# Allegro board remotepanasonicDB9-rout-V2-1.brd
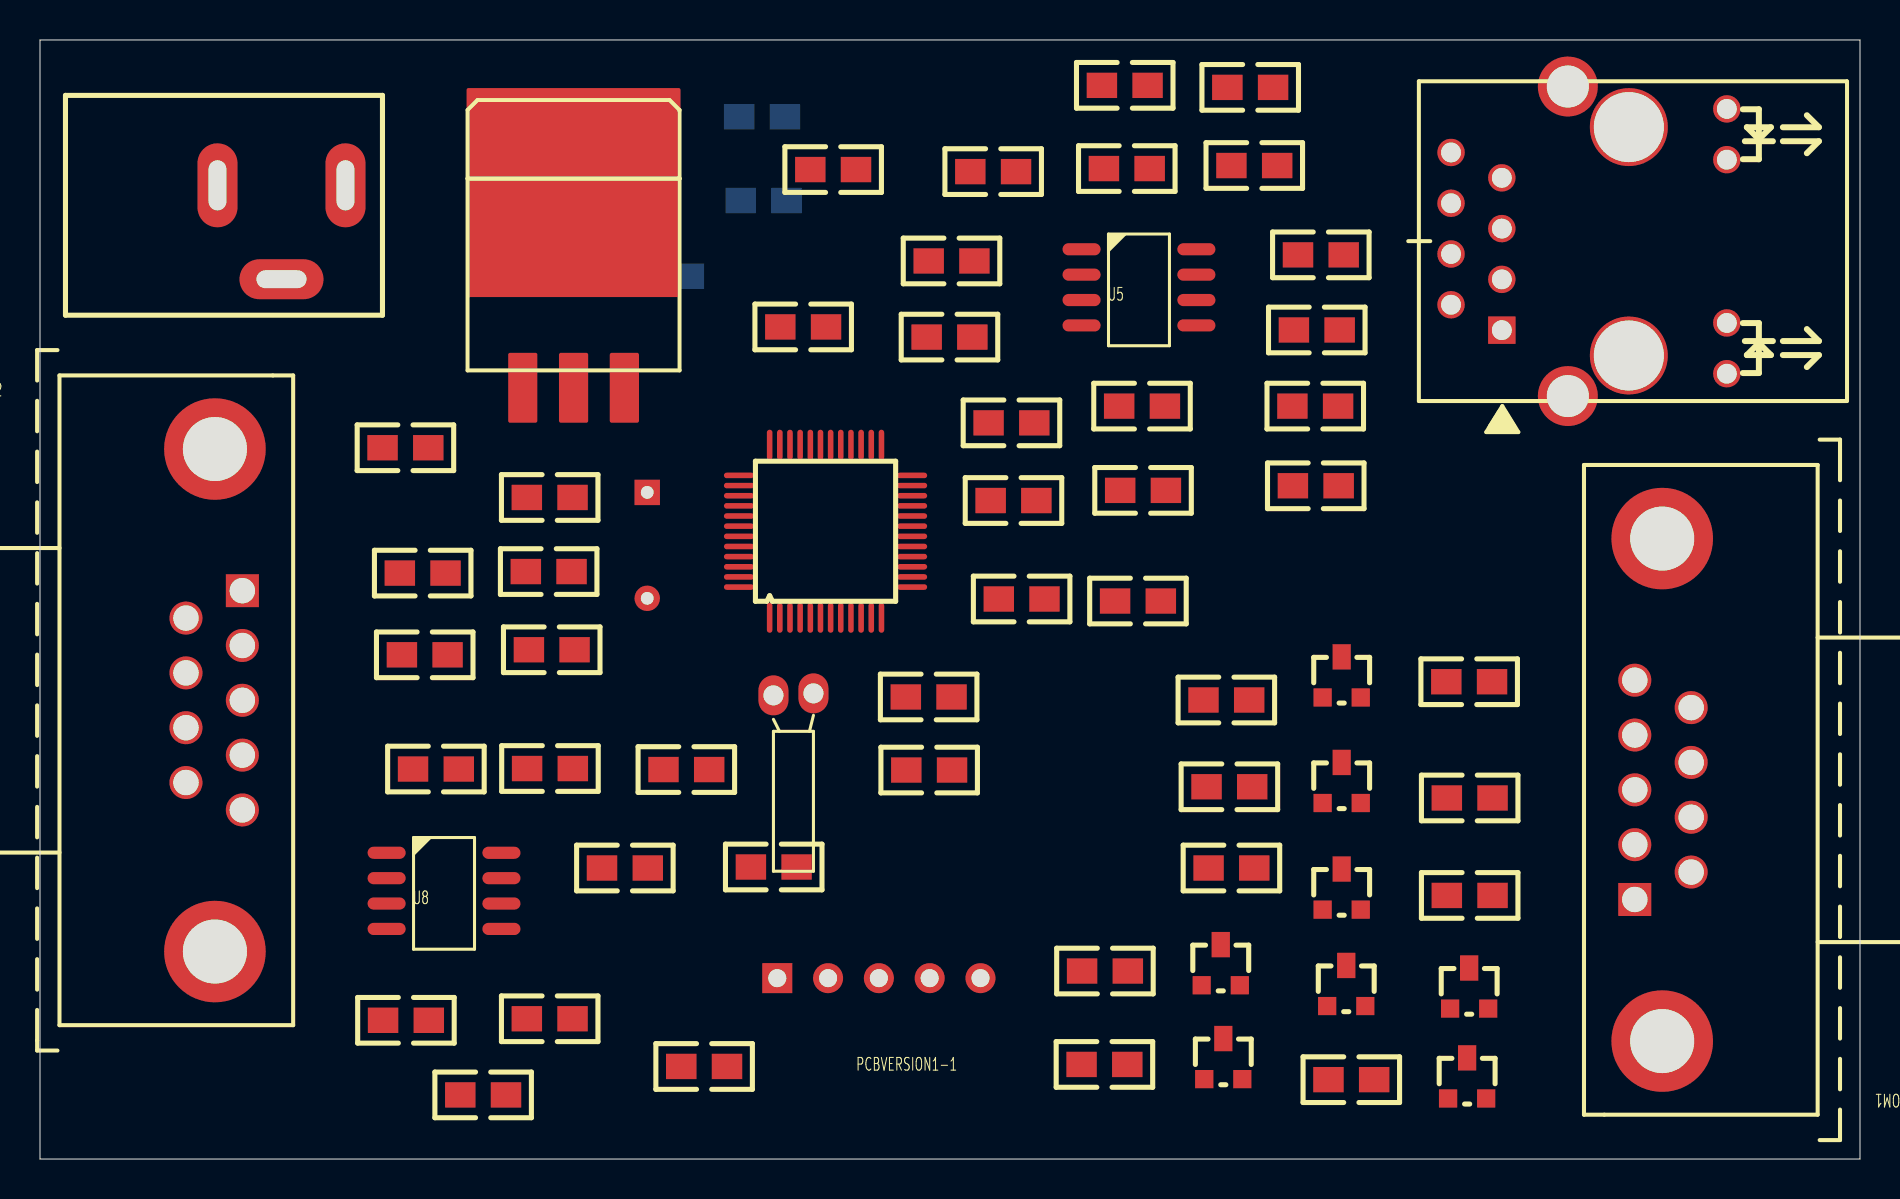
[diagram p0: board, top side]
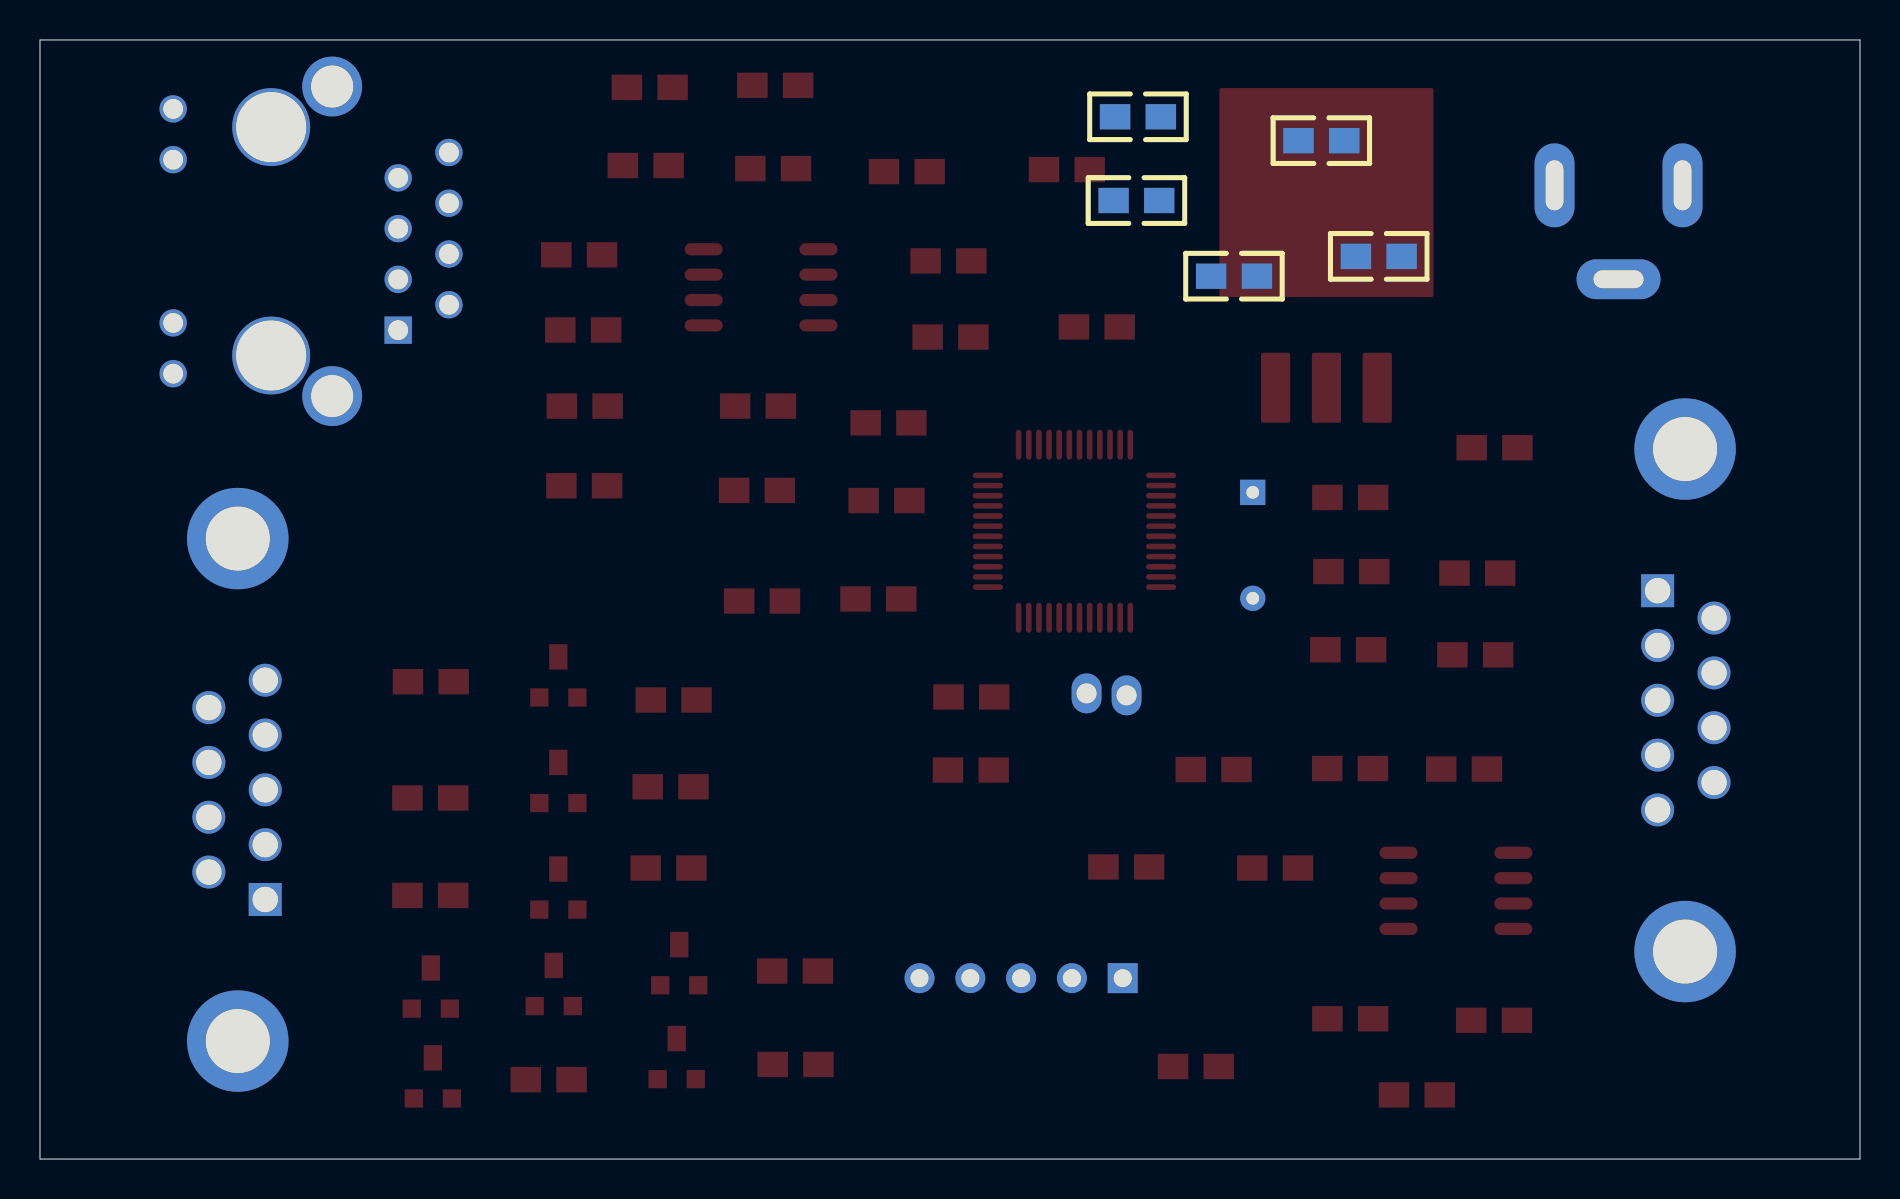
[diagram p1: board, bottom side, seen from below]

Outline 91 x 56 mm; copper layers: TOP, BOTTOM. Coordinates in mm from the lower left corner of the outline.
Outline path: 0,56 91,56 91,0 0,0 0,56

## Placement (name value [footprint] x y rotation side)
C1  20p  [0805]  25.59 25.49 0 top
C2  20p  [0805]  25.43 29.4 0 top
C3  10u  [0805]  24.06 45.17 180 bottom
C4  10u  [0805]  36.1 52.16 180 bottom
C5  22u  [0805]  36.18 47.96 180 bottom
C6  20p  [0805]  44.43 23.12 0 top
C7  20p  [0805]  32.32 19.49 0 top
C8  10u  [0805]  49.08 28.03 0 top
C9  0.1u  [0805]  45.47 41.13 0 top
C10  0.1u  [0805]  48.68 32.95 0 top
C11  0.1u  [0805]  36.69 14.61 0 top
COM1  BOXCONN_DB9  [DB9RA_M]  79.74 18.47 180 top
COM2  BOXCONN_DB9  [DB9RA_M]  10.12 22.96 0 top
IED1  <Value>  [HDR1X5]  36.86 9.05 0 top
L1  R0  [0805]  38.16 41.64 0 top
LED_3.1  RED  [0805]  60.71 49.72 0 top
LED_3.2  RED  [0805]  54.34 49.56 0 top
LED_3.3  RED  [0805]  18.3 6.94 0 top
LED_3.4  RED  [0805]  25.48 7.02 0 top
LED_3.5  RED  [0805]  54.24 53.73 0 top
Q1  2N7002LT1  [SOT23_B]  65.08 24.09 0 top
Q2  2N7002LT1  [SOT23_B]  65.08 18.81 0 top
Q3  2N7002LT1  [SOT23_B]  65.08 13.47 0 top
Q4  2N7002LT1  [SOT23_B]  71.46 8.52 0 top
Q5  2N7002LT1  [SOT23_B]  59.04 9.69 0 top
Q6  2N7002LT1  [SOT23_B]  59.17 4.99 0 top
Q7  2N7002LT1  [SOT23_B]  71.36 4.02 0 top
Q8  2N7002LT1  [SOT23_B]  65.31 8.65 0 top
R1  33  [0805]  18.27 35.59 0 top
R2  1M  [0805]  25.48 33.11 0 top
R3  10k  [0805]  31.3 44.18 180 bottom
R4  10M  [0805]  44.46 19.47 0 top
R5  22  [0805]  55.15 33.46 0 top
R6  22  [0805]  54.9 27.92 0 top
R7  4.7k  [0805]  63.79 33.69 0 top
R8  10k  [0805]  55.1 37.68 0 top
R9  100  [0805]  63.76 37.68 0 top
R10  100  [0805]  63.84 41.49 0 top
R11  10k  [0805]  48.57 36.84 0 top
R12  330  [0805]  60.51 53.63 0 top
R13  4.7k  [0805]  71.46 23.89 0 top
R14  10k  [0805]  71.48 18.07 0 top
R15  15k  [0805]  71.48 13.19 0 top
R16  330  [0805]  47.66 49.41 0 top
R17  4.7k  [0805]  53.25 9.41 0 top
R18  10k  [0805]  53.22 4.73 0 top
R19  15k  [0805]  65.57 3.97 0 top
R25  4.7k  [0805]  64.04 45.25 0 top
R26  4.7k  [0805]  29.24 14.56 0 top
R27  100  [0805]  59.32 22.97 0 top
R28  4.7k  [0805]  59.47 18.63 0 top
R29  10k  [0805]  19.13 29.32 0 top
R30  10k  [0805]  19.24 25.23 0 top
R31  100  [0805]  59.57 14.56 0 top
R32  22  [0805]  19.8 19.52 0 top
R33  22  [0805]  25.5 19.54 0 top
R34  0  [0805]  45.58 44.94 0 top
R35  0  [0805]  26.93 50.96 180 bottom
R36  330  [0805]  22.16 3.21 0 top
R37  330  [0805]  33.21 4.63 0 top
R38  330  [0805]  39.66 49.51 0 top
U1  DC205A  [DC205]  15.27 48.73 270 top
U2  AMS1086CM-3.3  [TO262]  26.68 45.09 0 top
U3  NUC122LC1AN  [NUC122LQFP48]  36.48 27.09 0 top
U5  MAX3488  [SOP8]  52.08 45.53 0 top
U8  MAX3488  [SOP8]  17.33 15.33 0 top
U10  RJ45  [HR911105A]  68.94 45.93 270 top
Y1  12M  [XALTDIP2]  30.36 33.36 270 top
Y2  32k  [XTAL-3_4MM-2P]  38.97 23.4 180 top

## Library data of the parts
C1-C3 C6-C11 = CAPACITOR NON-POL
C4 C5 = CAP NP
COM1 COM2 = CONNECTOR DB9_1
IED1 = CON5
L1 R1-R11 R13-R15 R17-R19 R25-R35 = R
LED_3.1-LED_3.5 = LED
Q1-Q8 = NPN_3
R12 R16 R36-R38 = RES1
U1 = DC205A
U2 = AMS1117: Tolerance: RichardLC; User Part Number: pn
U3 = NUC122LC1AN
U5 U8 = MAX485
U10 = RJ45
Y1 Y2 = CRYSTAL

## Footprints (pads in the part's own frame, mm; a bottom-side part is the same pattern mirrored in y, then rotated)
0805
  rect 1.524x1.27 smd: 1(-1.143,0) 2(1.143,0)
DB9RA_M
  rect 1.651x1.651 hole 1.27: 1(0,5.486)
  round 1.651 hole 1.27: 2(0,2.743) 3(0,0) 4(0,-2.743) 5(0,-5.486) 6(-2.819,4.115) 7(-2.819,1.372) 8(-2.819,-1.372) 9(-2.819,-4.115)
  round 5.08 hole 3.2: 10(-1.372,12.573) 11(-1.372,-12.573)
DC205
  oval 4.2x2 hole 2.5x0.889: 1(0,0) 2(0,-6.4)
  oval 2x4.2 hole 0.889x2.5: 3(4.7,-3.2)
HDR1X5
  rect 1.5x1.5 hole 0.9: 1(0,0)
  round 1.5 hole 0.9: 2(2.54,0) 3(5.08,0) 4(7.62,0) 5(10.16,0)
HR911105A
  round 3.9 hole 3.5 unplated: (-5.707,10.498) (5.723,10.498)
  rect 1.372x1.372 hole 0.991: 1(4.453,4.148)
  round 1.372 hole 0.991: 2(3.183,1.608) 3(1.913,4.148) 4(0.643,1.608) 5(-0.627,4.148) 6(-1.897,1.608) 7(-3.167,4.148) 8(-4.437,1.608) 9(6.633,15.398) 10(4.093,15.398) 11(-4.077,15.398) 12(-6.617,15.398)
  round 2.997 hole 2.1: M3(-7.737,7.448) M4(7.753,7.448)
NUC122LQFP48
  oval 0.279x1.5 smd: 1(0,0) 2(0.508,0) 3(1.016,0) 4(1.524,0) 5(2.032,0) 6(2.54,0) 7(3.048,0) 8(3.556,0) 9(4.064,0) 10(4.572,0) 11(5.08,0) 12(5.588,0) 25(5.588,8.66) 26(5.08,8.66) 27(4.572,8.66) 28(4.064,8.66) 29(3.556,8.66) 30(3.048,8.66) 31(2.54,8.66) 32(2.032,8.66) 33(1.524,8.66) 34(1.016,8.66) 35(0.508,8.66) 36(0,8.66)
  oval 1.5x0.279 smd: 13(7.124,1.536) 14(7.124,2.044) 15(7.124,2.552) 16(7.124,3.06) 17(7.124,3.568) 18(7.124,4.076) 19(7.124,4.584) 20(7.124,5.092) 21(7.124,5.6) 22(7.124,6.108) 23(7.124,6.616) 24(7.124,7.124) 37(-1.536,7.124) 38(-1.536,6.616) 39(-1.536,6.108) 40(-1.536,5.6) 41(-1.536,5.092) 42(-1.536,4.584) 43(-1.536,4.076) 44(-1.536,3.568) 45(-1.536,3.06) 46(-1.536,2.552) 47(-1.536,2.044) 48(-1.536,1.536)
SOP8
  oval 1.905x0.61 smd: 1(0,0) 2(0,-1.27) 3(0,-2.54) 4(0,-3.81) 5(5.74,-3.81) 6(5.74,-2.54) 7(5.74,-1.27) 8(5.74,0)
SOT23_B
  rect 0.914x1.27 smd: D(0,1.041)
  rect 0.914x0.914 smd: G(-0.953,-0.991) S(0.953,-0.991)
TO262
  custom 1.46x3.5 smd: 1(-2.54,-6.5) 2(0,-6.5) 3(2.54,-6.5)
  custom 10.7x10.46 smd: 4(0,3.27)
XALTDIP2
  rect 1.27x1.27 hole 0.635: 1(0,0)
  round 1.27 hole 0.635: 2(5.3,0)
XTAL-3_4MM-2P
  oval 1.5x2 hole 1: 1(0.3,0.1) 2(2.3,0.2)

## Nets
GND: C1.1 C2.1 C3.1 C4.2 C5.2 C6.1 C7.1 C8.1 C9.1 C10.1 C11.1 COM1.1 COM2.5 COM2.6 IED1.5 LED_3.2.2 Q4.S Q8.S R8.1 R11.1 R13.1 R14.1 R15.1 R17.1 R18.1 R19.1 R25.1 R28.1 R29.1 R30.1 R34.1 R35.1 U1.2(GND) U2.1(GND) U3.1(PVSS) U3.12(VSS) U5.4(GND) U8.4(GND) U10.1
VCC: C5.1 C9.2 C11.2 IED1.1 L1.2 R3.1 R7.2 R12.1 R16.1 R26.2 R36.1 R37.1 R38.1 U2.2(VOUT) U2.4(TAB) U3.11(VDD) U3.13(VBUS) U5.1(VCC) U8.1(VCC)
VCC5: C4.1 U1.1(VCC) U2.3(VIN)
422AI: R7.1 R9.1 U5.8(A) U10.6
422AO: COM1.2 R26.1 R27.1 U8.8(A)
422BI: R9.2 R25.2 U5.7(B) U10.3
422BO: COM1.5 R27.2 R28.2 U8.7(B)
422YI: R10.2 U5.5(Y) U10.5
422YO: COM1.3 R31.2 U8.5(Y)
422ZI: R10.1 U5.6(Z) U10.4
422ZO: COM1.9 R31.1 U8.6(Z)
A_AUDIO: COM2.7 Q4.D
A_AUDIO-1: Q8.D
A_INPUT: Q4.G U3.26(PC12)
A_INPUT1: Q8.G U3.41(PD3)
B_AUDIO: COM2.2 Q1.D Q2.D Q3.D
B_AUDIO-1: COM2.4 Q5.D Q6.D Q7.D
B_NET1: Q1.G U3.22(PC0/SPISS00)
B_NET2: Q2.G U3.21(PC1/SPICLK0)
B_NET3: Q3.G U3.20(PC2/MISO00)
B_NET11: Q5.G U3.38(PD0)
B_NET21: Q6.G U3.39(PD1)
B_NET31: Q7.G U3.40(PD2)
ICECLK: IED1.3 U3.36(ICE_CK)
ICEDATA: IED1.2 U3.35(ICE_DAT)
ICEREST: C3.2 IED1.4 R3.2 U3.46(/RESET)
PC8: LED_3.1.2 U3.30(PC8/SPISS10)
PC9: LED_3.3.2 U3.29(PC9/SPICLK1)
PC10: LED_3.4.2 U3.28(PC10/MISO10)
PC11: LED_3.5.2 U3.27(PC11/MOS110)
RXI: R5.1 R8.2 U5.2(RO)
RXO: R30.2 R32.1 U8.2(RO)
TXI: R6.1 R11.2 U5.3(DI)
TXO: R29.2 R33.1 U8.3(DI)
N5217252: C1.2 R1.1 R2.2 Y1.2
N5217271: C2.2 R2.1 U3.45(XT1_IN) Y1.1
N5217301: R1.2 U3.44(XT1_OUT)
N5217606: L1.1 U3.37(AVDD)
N5217811: C6.2 R4.2 U3.2(X32O) Y2.2
N5217823: C7.2 R4.1 U3.3(X321) Y2.1
N5218166: R5.2 U3.6(RXD1/PB4)
N5218170: R6.2 U3.7(TXD1/PB5)
N5218267: C8.2 U3.10(LDO)
N5218423: C10.2 U3.14(VDD33)
N5271660: Q1.S R13.2
N5271664: Q2.S R14.2
N5271668: Q3.S R15.2
N5281203: Q5.S R17.2
N5281215: Q7.S R19.2
N5281219: Q6.S R18.2
N5286003: R32.2 U3.17(PB0/RXD0)
N5286012: R33.2 U3.18(PB1/TXD0)
N5287388: R34.2 U10.2
N5287624: COM1.4 R35.2
N5293616: COM2.11
N5294368: COM2.3
N52191170: LED_3.2.1 R16.2
N52191690: LED_3.1.1 R12.2
N52878630: LED_3.3.1 R36.2
N52879570: LED_3.4.1 R37.2
N52880520: LED_3.5.1 R38.2

Pads without a net: COM1 6 7 8 10 11; COM2 1 8 9 10; U1 3; U3 4 5 8 9 15 16 19 23 24 25 31 32 33 34 42 43 47 48; U10 7 8 9 10 11 12 M3 M4

## Text on the board
Ref Des/Silkscreen Top: PCBVERSION1-1
DIMENSION: FIGURE | SIZE | 14.0 | 25.0 | 35.43 | 39.0 | 39.37 | 50.0 | 82.68 | 126.0 | 137.8 | 98.42x35.0 | DRILL CHART: TOP to BOTTOM | ALL UNITS ARE IN MILS | PLATED | NON-PLATED | QTY | 65 | 2 | 5 | 1 | 11 | 18 | 4
